# EAGLE board AVRI2CIO_V0_2_LEVEL1 (EAGLE 6.3)
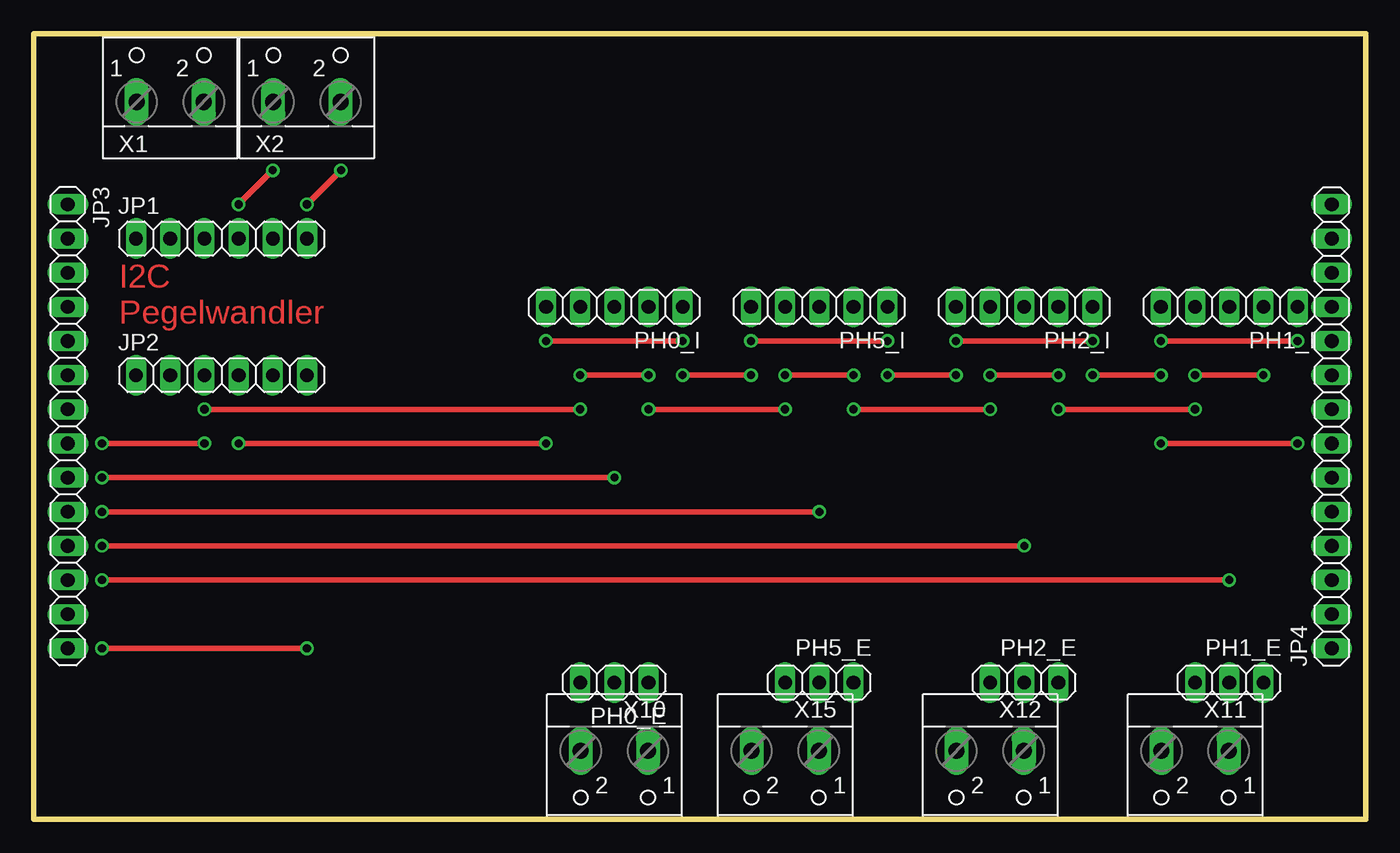
[diagram p0: board, top side]
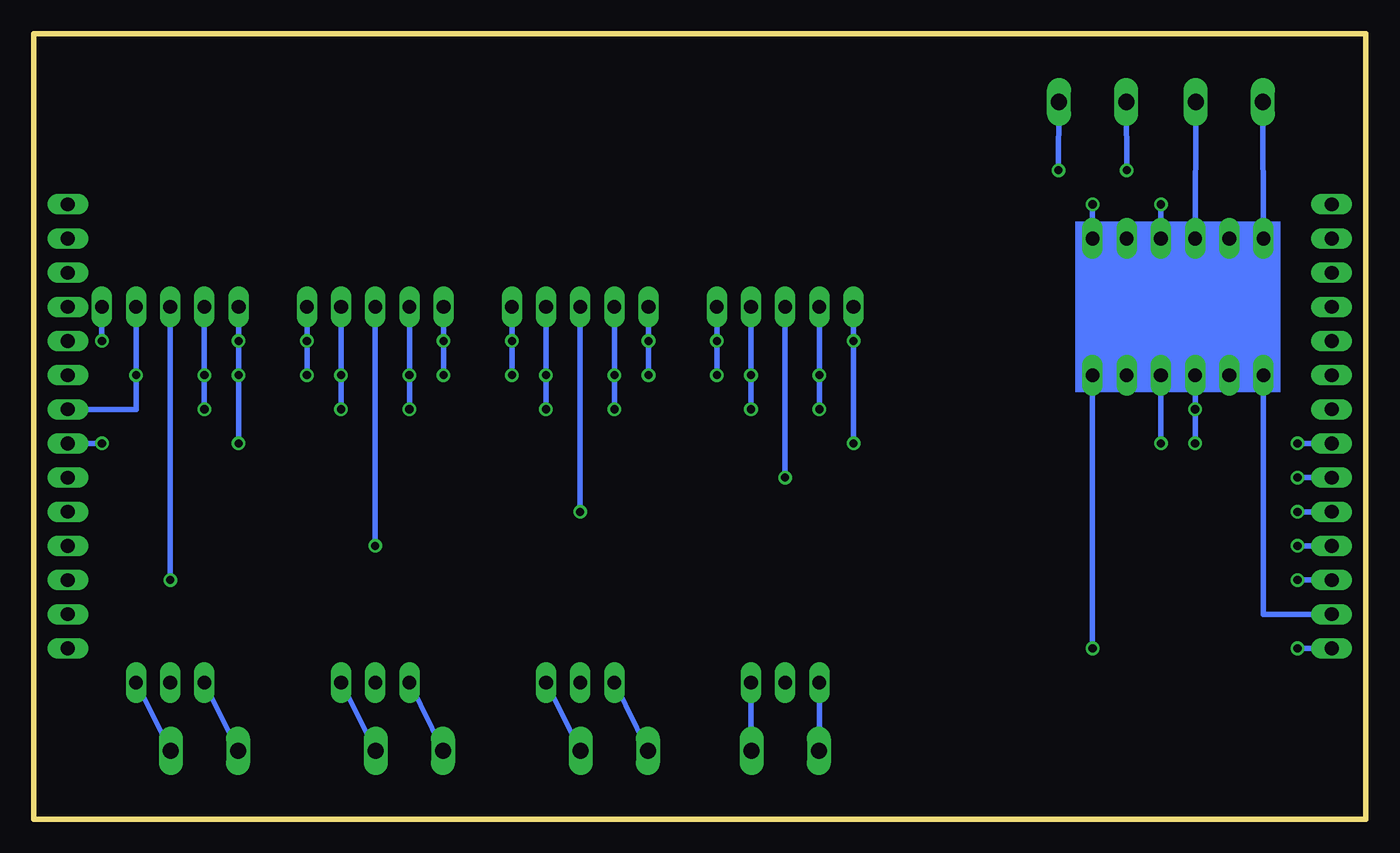
[diagram p1: board, bottom side, seen from below]

Size 99.06 x 58.42 mm. Coordinates in mm from the lower left corner, seen from the top.
Outline: 0,0 99.06,0 99.06,58.42 0,58.42 0,0
Copper layers (1*16): Top 0.035mm / dielectric 1.5mm / Bottom 0.035mm
Design rules "default": minimum track width 10mil, minimum drill 24mil, track to track 8mil, track to pad 8mil, pad to pad 8mil, via to via 8mil, smd to smd 8mil, copper to edge 40mil, drill to drill 8mil, minimum pad ring 10mil, minimum via ring 8mil, stop-mask expansion 4mil, vias tented up to drill 0mil, thermal gap 10mil

## Footprints (pad centres in the part's own frame; a part is rotated, then mirrored left to right if it is on the bottom)
1X06 = drill 1.016 long: 1 -6.35,0; 2 -3.81,0; 3 -1.27,0; 4 1.27,0; 5 3.81,0; 6 6.35,0
1X14 = drill 1.016 long: 1 -16.51,0; 2 -13.97,0; 3 -11.43,0; 4 -8.89,0; 5 -6.35,0; 6 -3.81,0; 7 -1.27,0; 8 1.27,0; 9 3.81,0; 10 6.35,0; 11 8.89,0; 12 11.43,0; 13 13.97,0; 14 16.51,0
1X03 = drill 1.016 long: 1 -2.54,0; 2 0,0; 3 2.54,0
1X05 = drill 1.016 long: 1 -5.08,0; 2 -2.54,0; 3 0,0; 4 2.54,0; 5 5.08,0
W237-102 = drill 1.194 long: 1 -2.5,-1.27; 2 2.5,-1.27

## Placement (x,y rotation side)
JP1  [1X06]  13.97,43.18 0 top
JP2  [1X06]  13.97,33.02 0 top
JP3  [1X14]  2.54,29.21 270 top
JP4  [1X14]  96.52,29.21 90 top
PH0_E  [1X03]  43.18,10.16 180 top
PH0_I  [1X05]  43.18,38.1 180 top
PH1_E  [1X03]  88.9,10.16 180 top
PH1_I  [1X05]  88.9,38.1 180 top
PH2_E  [1X03]  73.66,10.16 180 top
PH2_I  [1X05]  73.66,38.1 180 top
PH5_E  [1X03]  58.42,10.16 180 top
PH5_I  [1X05]  58.42,38.1 180 top
X1  [W237-102]  10.16,54.61 0 top
X2  [W237-102]  20.32,54.61 0 top
X10  [W237-102]  43.18,3.81 180 top
X11  [W237-102]  86.36,3.81 180 top
X12  [W237-102]  71.12,3.81 180 top
X15  [W237-102]  55.88,3.81 180 top

## Library data of the parts
JP1-JP4 PH0_E PH0_I PH1_E PH1_I PH2_E PH2_I PH5_E PH5_I = pinhead
X1 X2 X10-X12 X15 = con-wago-500; MPN: 237-102; OC_FARNELL: unknown; OC_NEWARK: 70K9898

## Nets
+5V: JP2.4 JP4.7 PH0_I.1 PH0_I.5 PH1_I.1 PH1_I.5 PH2_I.1 PH2_I.5 PH5_I.1 PH5_I.5
GND: JP2.3 JP3.8 JP4.8 PH0_I.2 PH0_I.4 PH1_I.2 PH1_I.4 PH2_I.2 PH2_I.4 PH5_I.2 PH5_I.4
N$1: PH0_E.3 X10.2
N$2: PH0_E.1 X10.1
N$3: JP3.11 PH2_I.3
N$4: JP3.12 PH1_I.3
N$5: JP3.10 PH5_I.3
N$6: JP3.9 PH0_I.3
N$7: JP1.6 X2.2
N$8: JP1.4 X2.1
N$9: JP1.3 X1.2
N$10: JP1.1 X1.1
N$11: JP2.6 JP3.14
N$12: JP2.1 JP3.13
N$19: PH1_E.1 X11.1
N$20: PH1_E.3 X11.2
N$23: PH2_E.1 X12.1
N$24: PH2_E.3 X12.2
N$29: PH5_E.1 X15.1
N$30: PH5_E.3 X15.2

## Tracks (layer width: path | path; a pad name or v marks a point on that pad's centre or on a via)
+5V  (via drill 0.6)
  Top 0.406: v93.98,35.56 v83.82,35.56 | v83.82,33.02 v78.74,33.02 | v78.74,35.56 v68.58,35.56 | v68.58,33.02 v63.5,33.02 | v63.5,35.56 v53.34,35.56 | v53.34,33.02 v48.26,33.02 | v48.26,35.56 v38.1,35.56 | v15.24,27.94 v38.1,27.94 | v93.98,27.94 v83.82,27.94
  Bottom 0.406: PH1_I.1 v93.98,35.56 | PH1_I.5 v83.82,35.56 v83.82,33.02 v83.82,27.94 | PH2_I.1 v78.74,35.56 v78.74,33.02 | v68.58,35.56 PH2_I.5 v68.58,33.02 | v63.5,33.02 v63.5,35.56 PH5_I.1 | v53.34,35.56 PH5_I.5 v53.34,33.02 | PH0_I.1 v48.26,35.56 v48.26,33.02 | PH0_I.5 v38.1,35.56 v38.1,27.94 | JP2.4 v15.24,27.94 | JP4.7 v93.98,27.94
GND  (via drill 0.6)
  Top 0.406: v91.44,33.02 v86.36,33.02 | v76.2,33.02 v71.12,33.02 | v86.36,30.48 v76.2,30.48 | v60.96,30.48 v71.12,30.48 | v60.96,33.02 v55.88,33.02 | v55.88,30.48 v45.72,30.48 | v40.64,33.02 v45.72,33.02 | v5.08,27.94 v12.7,27.94 | v12.7,30.48 v40.64,30.48
  Bottom 0.406: v86.36,33.02 PH1_I.4 v86.36,30.48 | PH1_I.2 v91.44,33.02 91.44,30.48 JP4.8 | PH2_I.4 v71.12,33.02 v71.12,30.48 | PH2_I.2 v76.2,33.02 v76.2,30.48 | PH5_I.2 v60.96,33.02 v60.96,30.48 | PH0_I.2 v45.72,33.02 v45.72,30.48 | PH5_I.4 v55.88,33.02 v55.88,30.48 | PH0_I.4 v40.64,33.02 v40.64,30.48 | JP3.8 v5.08,27.94 | JP2.3 v12.7,30.48 v12.7,27.94
N$1
  Bottom 0.406: X10.2 40.64,5.08 PH0_E.3
N$2
  Bottom 0.406: X10.1 45.72,5.08 PH0_E.1
N$3  (via drill 0.6)
  Top 0.406: v73.66,20.32 v5.08,20.32
  Bottom 0.406: JP3.11 v5.08,20.32 | PH2_I.3 v73.66,20.32
N$4  (via drill 0.6)
  Top 0.406: v5.08,17.78 v88.9,17.78
  Bottom 0.406: JP3.12 v5.08,17.78 | PH1_I.3 v88.9,17.78
N$5  (via drill 0.6)
  Top 0.406: v5.08,22.86 v58.42,22.86
  Bottom 0.406: JP3.10 v5.08,22.86 | PH5_I.3 v58.42,22.86
N$6  (via drill 0.6)
  Top 0.406: v5.08,25.4 v43.18,25.4
  Bottom 0.406: JP3.9 v5.08,25.4 | PH0_I.3 v43.18,25.4
N$7  (via drill 0.6)
  Top 0.406: v22.86,48.26 v20.32,45.72
  Bottom 0.406: JP1.6 v20.32,45.72 | X2.2 v22.86,48.26
N$8  (via drill 0.6)
  Top 0.406: v17.78,48.26 v15.24,45.72
  Bottom 0.406: JP1.4 v15.24,45.72 | X2.1 v17.78,48.26
N$9
  Bottom 0.406: X1.2 JP1.3
N$10
  Bottom 0.406: X1.1 JP1.1
N$11  (via drill 0.6)
  Top 0.406: v5.08,12.7 v20.32,12.7
  Bottom 0.406: JP3.14 v5.08,12.7 | JP2.6 v20.32,12.7
N$12
  Bottom 0.406: JP2.1 7.62,15.24 JP3.13
N$19
  Bottom 0.406: PH1_E.1 X11.1
N$20
  Bottom 0.406: PH1_E.3 X11.2
N$23
  Bottom 0.406: PH2_E.1 X12.1
N$24
  Bottom 0.406: PH2_E.3 X12.2
N$29
  Bottom 0.406: PH5_E.1 X15.1
N$30
  Bottom 0.406: PH5_E.3 X15.2
(copper drawn outside any net)
  shapes: Bottom area x1

## Text on the board
Top: I2C / Pegelwandler